# Altium PCB PowerBoard.PcbDoc
Units mm, origin at the board's own origin, x right, y up, seen from the top; angles counter-clockwise.
Board outline 77.78 x 66.43 mm, 2 copper layers (Top Layer, Bottom Layer); 46 components, 17 nets, 114 pads, 37 vias.
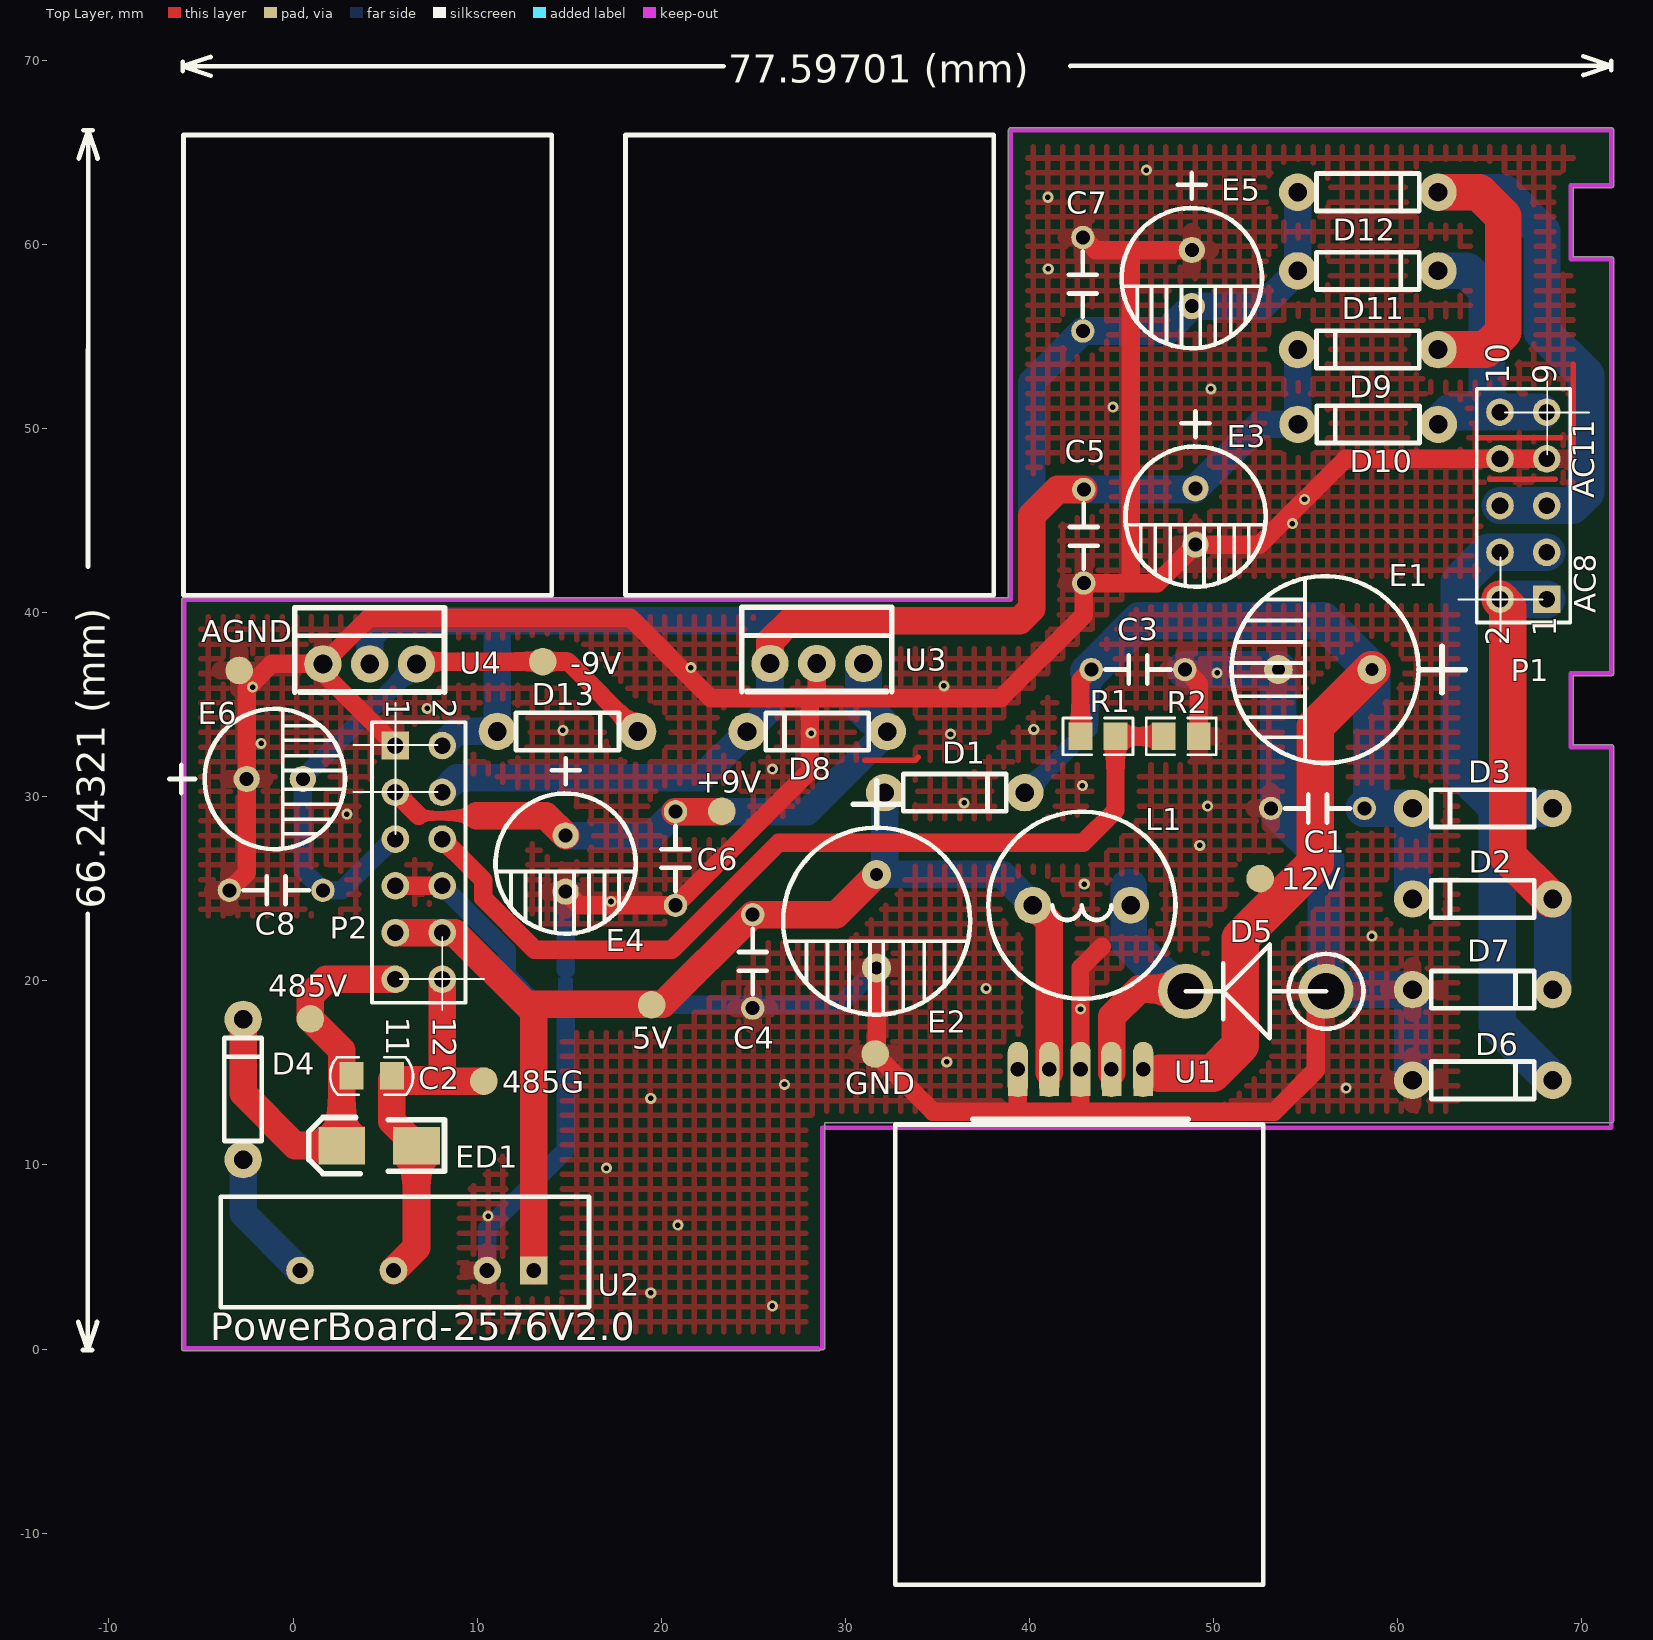
[diagram p0: Top Layer view]
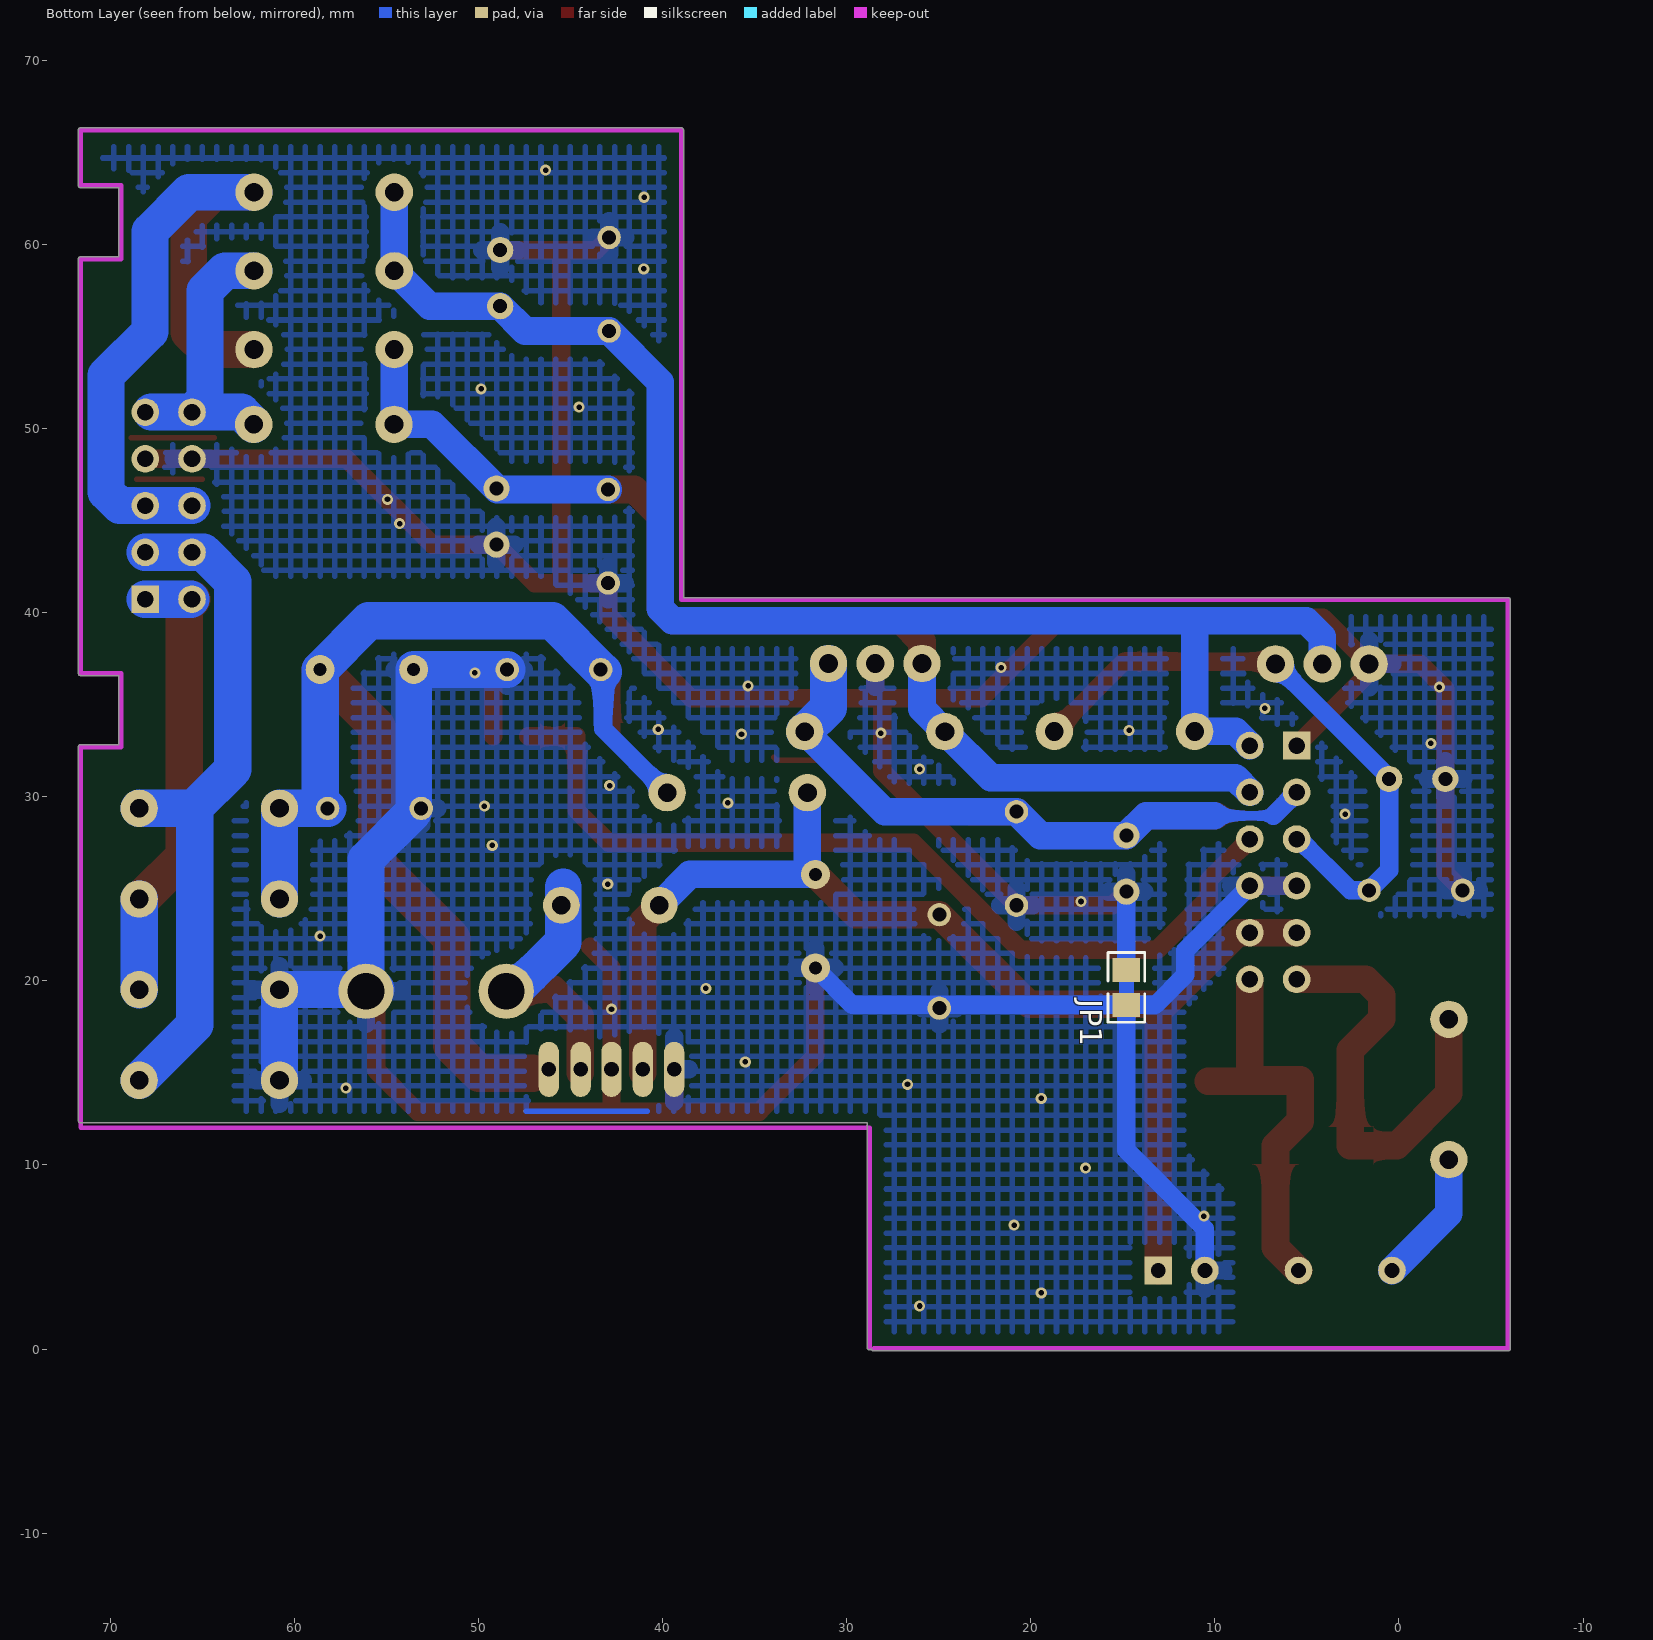
[diagram p1: Bottom Layer view, seen from below]

## Layer stack, top to bottom
Top Solder: solder mask 0.0102, Solder Resist, Dk 3.5
Top Layer: signal copper 0.0356
Dielectric 1: dielectric 0.32, FR-4, Dk 4.8
Bottom Layer: signal copper 0.0356
Bottom Solder: solder mask 0.0102, Solder Resist, Dk 3.5

## Board outline
-5.918,-0.102 28.524,-0.102 ccw(c28.524,0.025) 28.649,0.002 ccw(c28.753,0.076) 28.88,0.076 28.88,12.293 71.603,12.293 ccw(c71.603,12.421) 71.73,12.421 71.73,32.704 ccw(c71.603,32.704) 71.603,32.832 69.53,32.832 69.53,36.577 71.603,36.577 ccw(c71.603,36.704) 71.73,36.704 71.73,59.204 ccw(c71.603,59.204) 71.603,59.332 69.53,59.332 69.53,63.077 71.603,63.077 ccw(c71.603,63.204) 71.73,63.204 71.73,66.204 ccw(c71.603,66.204) 71.603,66.332 38.989,66.332 ccw(c38.989,66.204) 38.862,66.204 38.862,40.818 -5.918,40.818 ccw(c-5.918,40.691) -6.046,40.691 -6.046,0.025 ccw(c-5.918,0.025)

## Design rules (kind name [scope] priority, off if disabled: settings)
Clearance Clearance_Polygon [All vs InPolygon] p1: gap=0.635
Clearance [All] p2 off: gap=0.254
MinimumSolderMaskSliver MinimumSolderMaskSliver_1 [HasFootprint('rb.2/.4') vs HasFootprint('rb.2/.4')] p1: minsoldermaskwidth=0
MinimumSolderMaskSliver [All] p2: minsoldermaskwidth=0.254
PlaneConnect PlaneConnect_1 [IsVia] p1: planeconnectstyle=Direct reliefexpansion=0.508 reliefentries=4 reliefconductorwidth=0.254 reliefairgap=0.254
PlaneConnect [All] p2: planeconnectstyle=Relief reliefexpansion=0.508 reliefentries=4 reliefconductorwidth=1 reliefairgap=0.254
PolygonConnect PolygonConnect_1 [All vs IsVia] p1: connectstyle=Direct reliefconductorwidth=0.254 reliefentries=4 polygonreliefangle="90 Angle" airgapwidth=0.254
PolygonConnect [All] p2: connectstyle=Relief reliefconductorwidth=1 reliefentries=4 polygonreliefangle="90 Angle" airgapwidth=0.254
RoutingVias [All] p1: holewidth=0.457 width=0.762 viastyle="Through Hole" minholewidth=0.457 minwidth=0.762 maxholewidth=0.711 maxwidth=1.27
ShortCircuit ShortCircuit_GND&AGND [InNet('GND') vs InNet('AGND')] p1: allowed=TRUE
ShortCircuit [All] p2: allowed=FALSE
SilkToSilkClearance [All] p1: silktosilkclearance=0
SilkToSolderMaskClearance [IsPad] p1: minsilkscreentomaskgap=0 clearancetoexposedcopper=TRUE
SolderMaskExpansion [All] p1: expansion=0.102
Width [All] p1: maxlimit=2.54 minlimit=0.254 preferedwidth=0.305 minimp=50.000000 maximp=50.000000 favimp=50.000000
25 further rules are at their usual default settings.

## Components (designator, comment, footprint, x,y, rotation, side; value= is the part's Value field where it differs from the comment)
5V "TestPoint" TESTPOINT_1.5 19.482,18.694 r0 top
12V "TestPoint" TESTPOINT_1.5 52.527,25.552 r90 top
485G "TestPoint" TESTPOINT_1.5 10.363,14.554 r90 top
485V "TestPoint" TESTPOINT_1.5 0.94,17.932 r90 top
+9V "TestPoint" TESTPOINT_1.5 23.292,29.21 r90 top
-9V "TestPoint" TESTPOINT_1.5 13.564,37.338 r90 top
AGND "TestPoint" TESTPOINT_1.5 -2.921,36.855 r90 top
C1 "0.33uF" CAP200 58.191,29.362 r180 top
C2 "104" 0805/C2 4.267,14.834 r180 top
C3 "104" CAP200 43.358,36.906 r0 top
C4 "104" CAP200 24.968,23.597 r270 top
C5 "0.33uF" CAP200 42.951,46.685 r270 top
C6 "104" CAP200 20.777,29.185 r270 top
C7 "0.33uF" CAP200 42.901,60.376 r270 top
C8 "104" CAP200 -3.454,24.917 r0 top
D1 "1N4007" DIODE0.3 32.131,30.226 r0 top
D2 "1N4007" DIODE0.3 68.428,24.438 r180 top
D3 "1N4007" DIODE0.3 68.428,29.362 r180 top
D4 "1N5819" DIODE0.3 -2.718,10.287 r90 top
D5 "1N5822" SB540 48.489,19.431 r0 top
D6 "1N4007" DIODE0.3 60.809,14.605 r0 top
D7 "1N4007" DIODE0.3 60.809,19.529 r0 top
D8 "1N4007" DIODE0.3 32.283,33.528 r180 top
D9 "1N4007" DIODE0.3 62.192,54.28 r180 top
D10 "1N4007" DIODE0.3 62.205,50.216 r180 top
D11 "1N4007" DIODE0.3 54.572,58.572 r0 top
D12 "1N4007" DIODE0.3 54.572,62.84 r0 top
D13 "1N4007" DIODE0.3 11.1,33.553 r0 top
E1 "1000uF/25V" RB.2/.4 53.518,36.754 r180 top
E2 "1000uF/16V" RB.2/.4 31.852,20.701 r270 top
E3 "470uF/25V" C-220UF 49.022,46.736 r270 top
E4 "470uF/25V" C-220UF 14.808,27.889 r270 top
E5 "470uF/25V" C-220UF 48.819,59.69 r270 top
E6 "470uF/25V" C-220UF -2.515,30.963 r0 top
ED1 "10uF/16V" 3528 2.642,11.049 r180 top
GND "TestPoint" TESTPOINT_1.5 31.623,16.027 r180 top
JP1 "0805" 0805/R 14.808,18.694 r90 bottom
L1 "150uH" L-100UH 45.491,24.105 r180 top
P1 "Header 5X2" HDR2X5 68.097,40.729 r90 top locked
P2 "Header 6X2" HDR2X6 5.563,32.779 r270 top locked
R1 "100K" 0805/R 42.774,33.274 r0 top
R2 "100K" 0805/R 47.295,33.274 r0 top
U1 "LM2576" "TO-263 - 5" 46.177,15.011 r180 top
U2 "B0505LS_1WR2" B0505LS-1WR2 13.081,4.267 r180 top
U3 "LM7809" 78XX 28.448,37.236 r0 top
U4 "LM7909" 78XX 4.166,37.211 r0 top

## Footprints (in the part's own frame and the unit in brackets; to place one, negate y for a bottom-side part, rotate by r counter-clockwise, add the part's x,y. Pads: shape width x height; smd on the part's side, far side on the other; paste and mask are expansions set on the pad)
78XX [mil]
  round 80 hole 40: 1(-100,0) 2(0,0) 3(100,0)
  silkscreen extent -160,-60 160,120
0805/C2 [mm] "增加焊盘间距方便焊接"
  rect 1.3x1.5 smd: 1(-1.1,0) 2(1.1,0)
  silkscreen extent -2.25,-1.02 2.25,1.02, body extent -0.93,-0.62 1.07,0.63, height 0.78
0805/R [mm]
  rect 1.3x1.5 smd: 1(0,0) 2(1.9,0)
  silkscreen extent -0.95,-1 2.85,1, body extent 0.02,-0.62 2.02,0.63
3528 [mil]
  rect 100x80 smd: 1(0,0) 2(-160,0)
  silkscreen extent -220,-60 70,60
B0505LS-1WR2 [mm]
  rect 1.5x1.5 hole 0.8: 1(0,0)
  round 1.5 hole 0.8: 2(2.54,0) 4(7.62,0) 6(12.7,0)
  silkscreen extent -3,-4 17,2
C-220UF [mil]
  round 56 hole 30: 1(0,0) 2(120,0)
  silkscreen extent -165,-150 210,150
CAP200 [mil]
  round 50 hole 30: 1(0,0) 2(200,0)
  silkscreen extent 30,-30 170,30
DIODE0.3 [mil]
  round 80 hole 40: 1(-0.02,-0.29) 2(299.98,-0.29)
  silkscreen extent 40,-40 260,40
HDR2X5 [mm] "Connector; Header; 5x2 Position"
  rect 1.5x1.5 hole 0.9: 1(0,0)
  round 1.5 hole 0.9: 2(0,2.54) 3(2.54,0) 4(2.54,2.54) 5(5.08,0) 6(5.08,2.54) 7(7.62,0) 8(7.62,2.54) 9(10.16,0) 10(10.16,2.54)
  silkscreen extent -1.27,-1.27 11.43,3.81
HDR2X6 [mm] "Connector; Header; 6x2 Position"
  rect 1.5x1.5 hole 0.9: 1(0,0)
  round 1.5 hole 0.9: 2(0,2.54) 3(2.54,0) 4(2.54,2.54) 5(5.08,0) 6(5.08,2.54) 7(7.62,0) 8(7.62,2.54) 9(10.16,0) 10(10.16,2.54) 11(12.7,0) 12(12.7,2.54)
  silkscreen extent -1.27,-1.27 13.97,3.81
L-100UH [mm]
  round 2 hole 1: 1(0,0) 2(5.309,0)
  silkscreen extent -2.44,-5.08 7.72,5.08
RB.2/.4 [mil]
  round 62 hole 28: 1(-200,-6) 2(0,-6)
  silkscreen extent -400,-206 100,194
SB540 [mm]
  round 3 hole 2: 1(7.62,0) 2(0,0)
  silkscreen extent 0,-2.54 9.65,2.54
TESTPOINT_1.5 [mm]
  round 1.5 smd: 1(0,0)
"TO-263 - 5" [mil]
  rect 42x100 smd: 1(0,0) 2(67,0) 3(134,0) 4(201,0) 5(268,0)
  silkscreen extent -96,100 364,100

## Part data
C1 C4 C5 C6 C7 C8: library part CAP
C2 C3: library part CAP, "Capacitor"
D1 D2 D3 D4 D6 D7 D8 D9 D10 D11 D12 D13: library part DIODE, "Diode"
D5: library part ZENER2, "Zener Diode"
E1 E2 E3 E4 E5 E6 ED1: library part ELECTRO1
JP1: library part JUMPER, "Jumper"
L1: library part L
P1: "Header, 5-Pin, Dual row"
P2: "Header, 6-Pin, Dual row"
R1 R2: library part RES2
U3: library part MC7812T
U4: library part MC7912T

## Free pads (board coordinates)
  oval 1.1x3 hole 0.8: 2(39.37,15.189) 3(41.072,15.189) 4(42.774,15.189) 5(44.45,15.189) 6(46.177,15.189)

## Via types
v1: diameter 0.6, hole 0.3, Top Layer to Bottom Layer, tented both sides, 37 vias

## Nets (pads, with @x,y where several pads share a name; then routed paths per layer and width w, separated by ;. In a path a pad name is that pad's centre, name@x,y a point inside that pad or via, vN(x,y) a via of type N, cw(c..) or ccw(c..) an arc to the next point about the centre after c; other vN are vias at no path point)
+9V: +9V.1 C6.1 D8.1 E4.1 P2.3 U3.3 | length 47
  Top Layer w0.5: 6.833,28.969 9.969,28.969
  Top Layer w1: P2.3 6.833,28.969
  Top Layer w1.5: 9.969,28.969 13.729,28.969 E4.1 ; C6.1 +9V.1@23.266,29.185
  Bottom Layer w0.5: 6.833,28.969 10.033,28.969
  Bottom Layer w1: P2.3 6.833,28.969
  Bottom Layer w1.5: 10.033,28.969 13.729,28.969 E4.1 19.482,27.889 C6.1 27.933,29.185 D8.1
  Bottom Layer w2: U3.3 30.988,34.831 D8.1
+12V: P2.6 R1.2 R2.1 | length 49.4
  Top Layer w1: P2.6 10.338,25.464 10.338,24.486 13.132,21.692 20.574,21.692 26.391,27.508 42.926,27.508 44.674,29.256 R1.2 R2.1
+V: C5.1 D8.2 D9.2 D10.2 E3.1 P2.4 U3.1 | length 63.9
  Top Layer w1.5: U3.1 25.908,38.43 27.038,39.56 39.457,39.56 40.12,40.222 40.12,45.276 41.529,46.685 C5.1
  Bottom Layer w1.5: P2.4 8.903,31.039 22.167,31.039 D8.2 25.908,34.78 U3.1 ; C5.1 48.971,46.685 E3.1 52.522,50.236 54.573,50.236 D9.2
-9V: -9V.1 C8.2 D13.2 E6.2 P2.5 U4.3 | length 34.5
  Top Layer w1: E6.2 E6.2@0.737,30.963 ; U4.3@6.706,36.932 U4.3 6.833,37.338 -9V.1 14.927,37.338 D13.2
  Bottom Layer w1: P2.5 5.423,27.699 2.642,24.917 C8.2 0.533,26.01 E6.2 0.533,31.039 U4.3
-V: C7.2 D11.1 D12.1 D13.1 E5.2 P2.2 U4.2 | length 80.9
  Bottom Layer w1.5: U4.2 4.166,38.684 5.041,39.56 11.024,39.56 ; P2.2 8.87,33.546 D13.1 11.099,39.484 11.024,39.56 ; D12.1 D11.1 52.649,56.642 E5.2 47.473,55.296 C7.2 40.12,52.515 40.12,40.222 39.457,39.56 11.024,39.56
AC8+: D2.1 D7.2 P1.1 P1.2 | length 24.9
  Top Layer w2.032: P1.2 65.989,40.297 65.989,26.772 68.315,24.446 D2.1
  Bottom Layer w2.032: P1.2@65.634,40.729 P1.1 ; D7.2 D2.1
AC8-: D3.1 D6.2 P1.3 P1.4 | length 37.6
  Bottom Layer w2.032: 65.456,29.37 D3.1 ; P1.3 P1.4 64.935,43.269 63.348,41.681 63.348,31.478 65.405,29.421 65.405,17.621 D6.2
AC11+: D9.1 D12.2 P1.5 P1.6 | length 40.9
  Top Layer w2: D9.1 64.777,54.287 65.735,55.245 65.735,61.519 64.422,62.832 D12.2
  Bottom Layer w2: D12.2 65.717,62.832 67.843,60.706 67.843,55.27 70.222,52.892 70.222,46.549 69.482,45.809 P1.5 P1.6
AC11-: D10.1 D11.2 P1.9 P1.10 | length 15.8
  Bottom Layer w2: D11.2 63.761,58.565 64.846,57.48 64.846,51.6 P1.10 ; D10.1 62.871,50.889 P1.10 ; P1.9@67.767,50.889 P1.10
AGND: AGND.1 C5.2 C6.2 C7.1 C8.1 E3.2 E4.2 E5.1 E6.1 JP1.2 P1.7 P1.8 P2.1 U3.2 U4.1 | length 164.5
  Top Layer w0.3: 31.064,31.979 33.803,31.979 33.955,32.131 ; 64.338,49.492 68.846,49.492 ; 65.003,47.24 68.551,47.24 ; 69.53,48.986 69.53,53.492
  Top Layer w1: C8.1 -2.515,25.857 E6.1 -2.515,35.865 -1.168,37.211 U4.1 ; P2.1 1.626,36.716 U4.1 ; E4.2 15.545,24.105 C6.2 28.067,31.394 28.067,35.357 ; U3.2 28.448,35.738 28.067,35.357 ; C7.1 43.586,59.69 45.491,59.69 ; E5.1 45.491,59.69 ; P1.7 P1.8 57.163,48.349 52.502,43.688 E3.2 46.939,41.605 45.314,41.605 ; U4.1 4.14,39.726 18.313,39.726 22.682,35.357 28.067,35.357 ; 28.067,35.357 38.456,35.357 42.951,39.853 C5.2 45.314,41.605 ; 45.314,41.605 45.491,41.783 45.491,59.69
  Bottom Layer w1: JP1.2 E4.2
  other v1: 17.272,24.308 2.921,29.058 26.035,31.496 -1.727,32.893 35.712,33.401 28.143,33.452 14.656,33.604 7.29,34.798 -2.197,35.957 35.357,36.017 21.615,37.008 54.28,44.831 54.94,46.152 44.526,51.156 49.86,52.146 41.021,58.674 41.003,62.56 46.355,64.033
GND485: 485G.1 C2.1 ED1.2 P2.12 U2.4 | length 24.5
  Top Layer w1.5: U2.4 6.706,5.512 ED1.2 5.367,12.387 C2.1@5.367,14.63 ; P2.12 8.103,14.961 7.772,14.63 C2.1@5.367,14.63 ; 485G.1 5.443,14.554 C2.1@5.367,14.63
GNDMCU: C1.2 C3.2 C4.2 D5.1 D6.1 D7.1 E1.2 E2.2 GND.1 JP1.1 P2.7 P2.8 pad.2 pad.4 R2.2 U1.3 U1.5 U2.2 | length 136.8
  Top Layer w1: P2.7 P2.8 ; E2.2@31.699,20.142 31.699,15.951 34.755,12.895 39.345,12.895 ; U1.5 39.37,12.921 39.345,12.895 ; U1.3 42.774,12.997 42.672,12.895 ; pad.4 42.774,20.701 43.917,21.844 ; C3.2 49.195,36.149 R2.2 ; D5.1@55.55,19.558 55.55,15.138 53.307,12.895 42.672,12.895 ; 39.345,12.895 42.672,12.895
  Bottom Layer w0.3: 40.83,12.926 47.403,12.926
  Bottom Layer w1: P2.8 11.608,21.654 11.608,20.32 13.233,18.694 JP1.1 ; U2.2 10.541,6.528 14.808,10.795 JP1.1 ; E2.2 29.693,18.694 JP1.1
  Bottom Layer w2: C3.2 E1.2 53.518,29.185 56.109,26.594 D5.1@56.109,20.117 ; D5.1@55.55,19.558 D5.1@56.109,20.117 ; D6.1 D7.1 56.704,19.522 D5.1@56.109,20.117
  other v1: 26.035,2.337 19.431,3.048 20.904,6.731 10.603,7.214 17.018,9.83 19.431,13.614 57.201,14.173 26.695,14.376 35.509,15.596 42.774,18.466 37.643,19.583 58.603,22.428 42.977,25.248 49.251,27.356 49.682,29.492 36.449,29.667 42.875,30.607 40.234,33.655 50.19,36.728
Net12V_1: 12V.1 C1.1 C3.1 D1.2 D2.2 D3.2 E1.1 pad.6 R1.1 U1.1 | length 73.1
  Top Layer w1: R1.1 42.774,36.322 C3.1
  Top Layer w2.032: 47.066,14.986 49.962,14.986 51.46,16.485 51.46,22.327 55.524,26.391 55.524,33.833 E1.1
  Bottom Layer w1: D1.2 43.23,33.698 C3.1@43.23,36.779
  Bottom Layer w2.032: C3.1@43.23,36.779 C3.1 45.999,39.548 55.956,39.548 E1.1 58.598,29.769 C1.1 58.199,29.37 D3.2 D2.2
NetD4_1: D4.1 U2.6 | length 7.3
  Bottom Layer w1.5: D4.1 -2.71,7.359 U2.6
NetD5_2: D5.2 L1.1 pad.5 U1.2 | length 13.7
  Top Layer w1.5: U1.2 44.475,18.059 45.974,19.558
  Top Layer w1.52: 45.974,19.558 D5.2@47.93,19.558
  Bottom Layer w2: L1.1@45.39,25.095 45.39,22.098 D5.2@47.93,19.558
VCC485: 485V.1 C2.2 D4.2 ED1.1 P2.11 | length 24.4
  Top Layer w1.5: D4.2 -2.71,13.886 0.127,11.049 ED1.1 2.642,16.231 485V.1 0.94,19.202 1.816,20.079 P2.11
VCCMCU: 5V.1 C4.1 D1.1 E2.1 L1.2 P2.9 P2.10 pad.3 U1.4 U2.1 | length 68.6
  Top Layer w1.5: P2.9 P2.10 8.776,22.619 12.675,18.72 ; U2.1 13.081,18.313 12.675,18.72 ; E2.1 29.515,23.597 C4.1 20.091,18.72 12.675,18.72 ; L1.2 41.072,23.216 U1.4
  Bottom Layer w1.5: D1.1 32.131,26.212 E2.1 38.506,25.781 L1.2

## Polygon pours and split planes (outlines as drawn)
AGND on Top Layer "Bottom Layer-No Net" (hatched 90Degree grid 0.8 track 0.3, remove dead copper, pour order 38): 69.53,66.421 39.014,66.421 39.014,40.716 38.989,40.691 38.913,40.615 -6.248,40.615 -6.248,23.825 -6.528,23.546 3.404,23.546 3.581,23.724 3.581,30.15 4.674,31.242 10.947,31.242 11.201,30.988 12.751,29.439 12.751,25.298 12.751,23.647 13.31,23.089 20.752,23.089 23.495,25.832 29.642,31.979 36.246,31.979 40.386,36.119 43.409,39.141 46.253,41.986 65.786,41.986 69.53,45.73
GNDMCU on Top Layer "Bottom Layer-No Net" (hatched 90Degree grid 0.8 track 0.3, remove dead copper, pour order 42): 61.087,40.361 45.999,40.361 42.342,36.703 36.627,30.988 31.191,30.988 30.505,30.988 24.282,24.765 20.904,21.387 12.497,21.387 11.506,22.377 11.506,26.238 10.033,27.711 8.407,27.711 5.69,27.711 4.801,26.822 4.801,21.615 5.309,21.107 6.553,21.107 9.042,21.107 10.516,19.634 11.684,18.466 11.684,13.157 11.684,10.744 9.881,8.941 9.042,8.103 9.042,0.025 59.614,0.025 63.271,3.683 63.271,40.361
AGND on Bottom Layer "Bottom Layer-No Net" (hatched 90Degree grid 0.8 track 0.3, remove dead copper, pour order 40): 70.409,66.421 39.014,66.421 39.014,40.716 38.989,40.691 38.913,40.615 -6.248,40.615 -6.248,23.825 -6.528,23.546 3.404,23.546 3.581,23.724 3.581,30.15 4.674,31.242 10.947,31.242 11.201,30.988 12.751,29.439 12.751,25.298 12.751,23.165 13.741,22.174 19.837,22.174 23.495,25.832 29.642,31.979 36.246,31.979 40.386,36.119 43.409,39.141 46.253,41.986 69.037,41.986 70.409,43.358
GNDMCU on Bottom Layer "Bottom Layer-No Net" (hatched 90Degree grid 0.8 track 0.3, remove dead copper, pour order 44): 61.087,40.361 45.999,40.361 42.342,36.703 36.627,30.988 31.191,30.988 30.505,30.988 24.282,24.765 20.904,21.387 12.497,21.387 11.506,22.377 11.506,26.238 10.033,27.711 8.407,27.711 5.69,27.711 4.801,26.822 4.801,21.615 5.309,21.107 6.553,21.107 9.042,21.107 10.516,19.634 11.684,18.466 11.684,13.157 11.684,10.744 9.881,8.941 9.042,8.103 9.042,0.025 59.614,0.025 63.271,3.683 63.271,40.361

## Keep-outs
Keep-Out Layer:
  lines w0.254: 28.524,0.025 -5.918,0.025 -5.918,40.691 38.989,40.691 38.989,66.204 49.603,66.204 53.603,66.204 71.603,66.204 71.603,63.204 69.403,63.204 69.403,59.204 71.603,59.204 71.603,36.704 69.403,36.704 69.403,32.704 71.603,32.704 71.603,12.014 28.753,12.014 28.753,0.076

## Other copper
Bottom Layer:
  rectangle net GNDMCU: 14.402,18.974 15.215,20.142

## Silkscreen, mask and mechanical layers (free items; w line width, h text height)
Top Overlay:
  lines w0.1: 3.277,30.264 7.849,30.264 ; 3.277,32.804 7.849,32.804 ; 5.563,27.978 5.563,32.55 ; 5.563,30.518 5.563,35.09 ; 5.817,20.104 10.389,20.104 ; 8.103,18.415 8.103,22.39 ; 63.297,40.71 67.869,40.71 ; 65.583,38.424 65.583,42.996 ; 65.837,50.87 70.409,50.87 ; 68.123,48.584 68.123,53.156
  lines w0.254: -11.658,1.473 -11.151,-0.051 ; -11.634,64.669 -11.125,66.192 ; -11.405,-0.051 -10.897,-0.051 ; -11.379,66.192 -10.871,66.192 ; -11.142,23.65 -11.151,-0.051 ; -11.134,42.491 -11.125,66.192 ; -10.642,1.473 -11.151,-0.051 ; -10.618,64.668 -11.125,66.192 ; -5.994,69.418 -5.995,69.926 ; -4.47,69.165 -5.994,69.672 ; -4.471,70.181 -5.994,69.672 ; 23.384,69.684 -5.994,69.672 ; 42.225,69.692 71.603,69.704 ; 70.079,69.196 71.603,69.704 ; 70.078,70.212 71.603,69.704 ; 71.603,69.45 71.602,69.958 ; -5.944,40.945 14.056,40.945 14.056,65.938 -5.944,65.938 -5.944,40.945 ; 18.059,40.945 18.059,65.938 38.059,65.938 38.059,40.945 18.059,40.945 ; 32.705,-12.802 32.705,12.192 52.705,12.192 52.705,-12.802 32.705,-12.802
  text "77.59701 (mm)" at 23.638,68.77 h1.52 r0.02
  text "AC11" at 71.069,46.203 h2 r90
  text "AC8" at 71.145,39.954 h2 r90
  text "66.24321 (mm)" at -10.227,23.904 h1.52 r89.98
  text "PowerBoard-2576V2.0" at -4.496,0.483 h1.5

## Text inside footprints (layer, text, board x,y; h text height)
P1: Top Overlay "2" at 66.065,38.189 h1.27 r90; Top Overlay "1" at 68.605,38.697 h1.27 r90; Top Overlay "9" at 68.605,52.413 h1.27 r90; Top Overlay "10" at 66.065,52.413 h1.27 r90
P2: Top Overlay "12" at 7.595,18.047 h1.27 r270; Top Overlay "1" at 5.055,17.031 h1.27 r270; Top Overlay "1" at 5.055,18.047 h1.27 r270; Top Overlay "1" at 5.055,35.319 h1.27 r270; Top Overlay "2" at 7.595,35.319 h1.27 r270